# EAGLE board panel (EAGLE 9.3.0), part 1 of 3
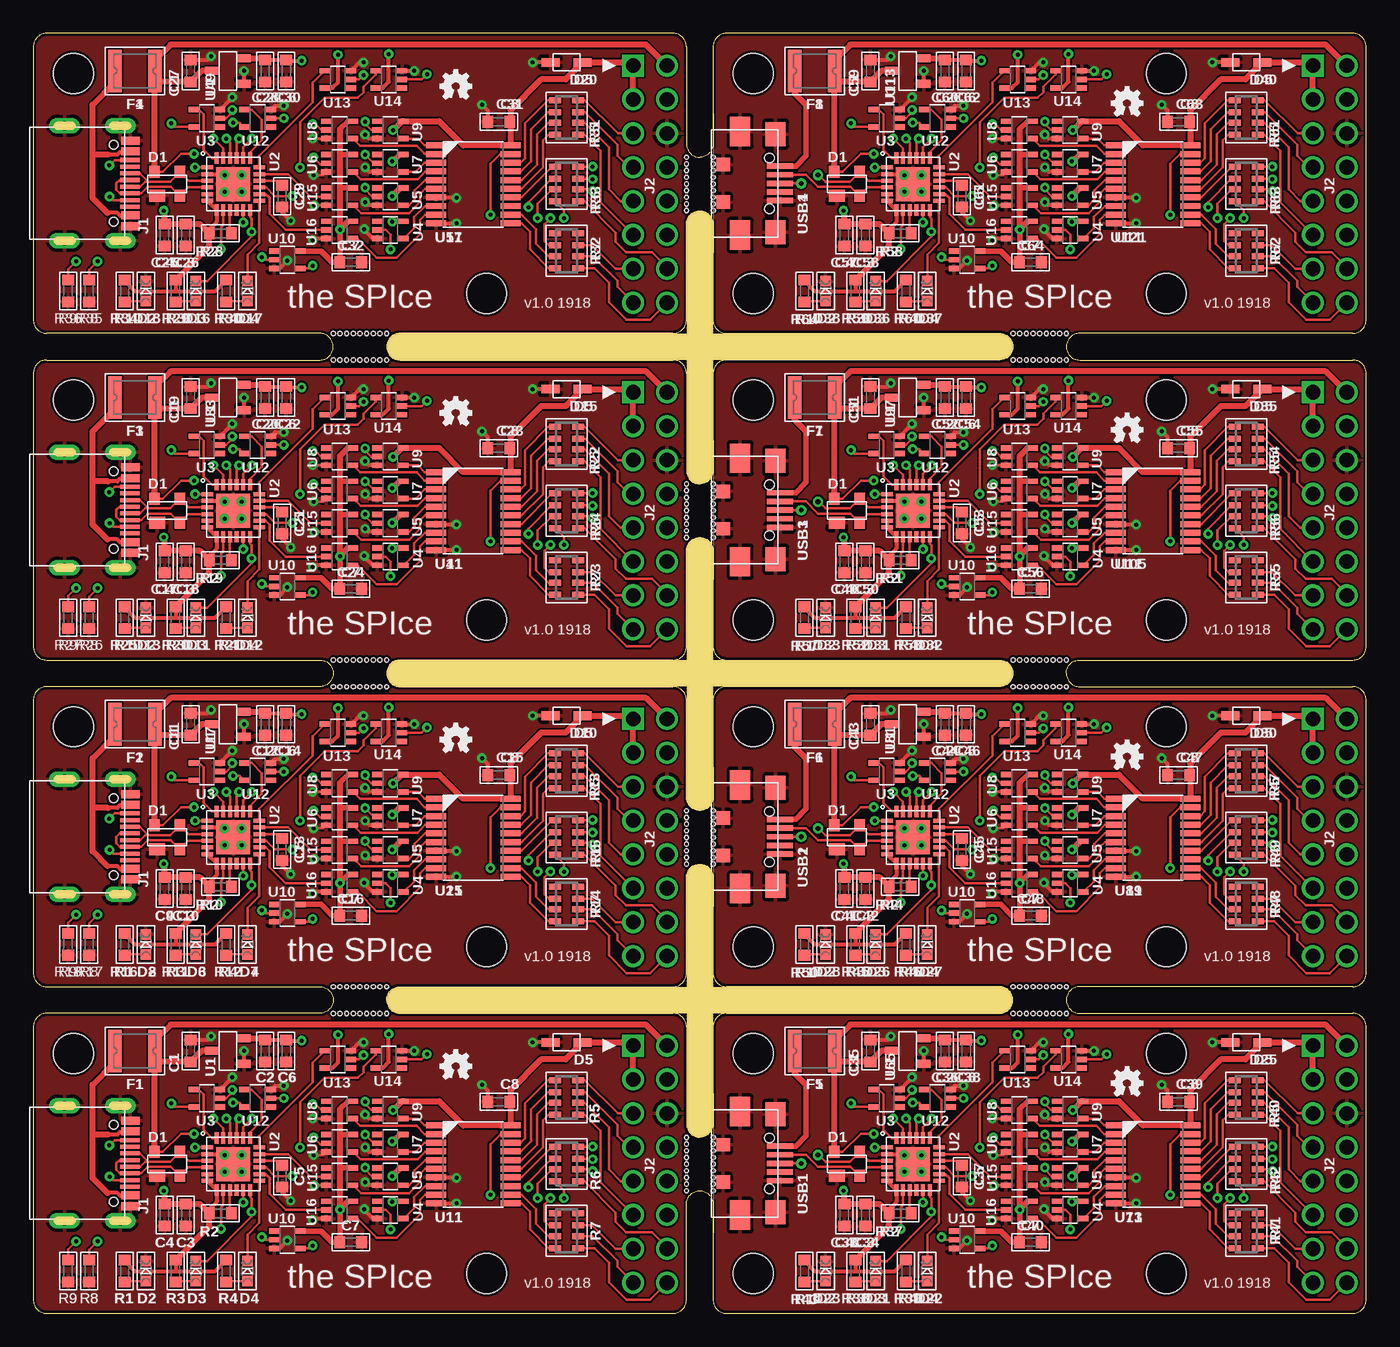
[diagram p0: board, top side]
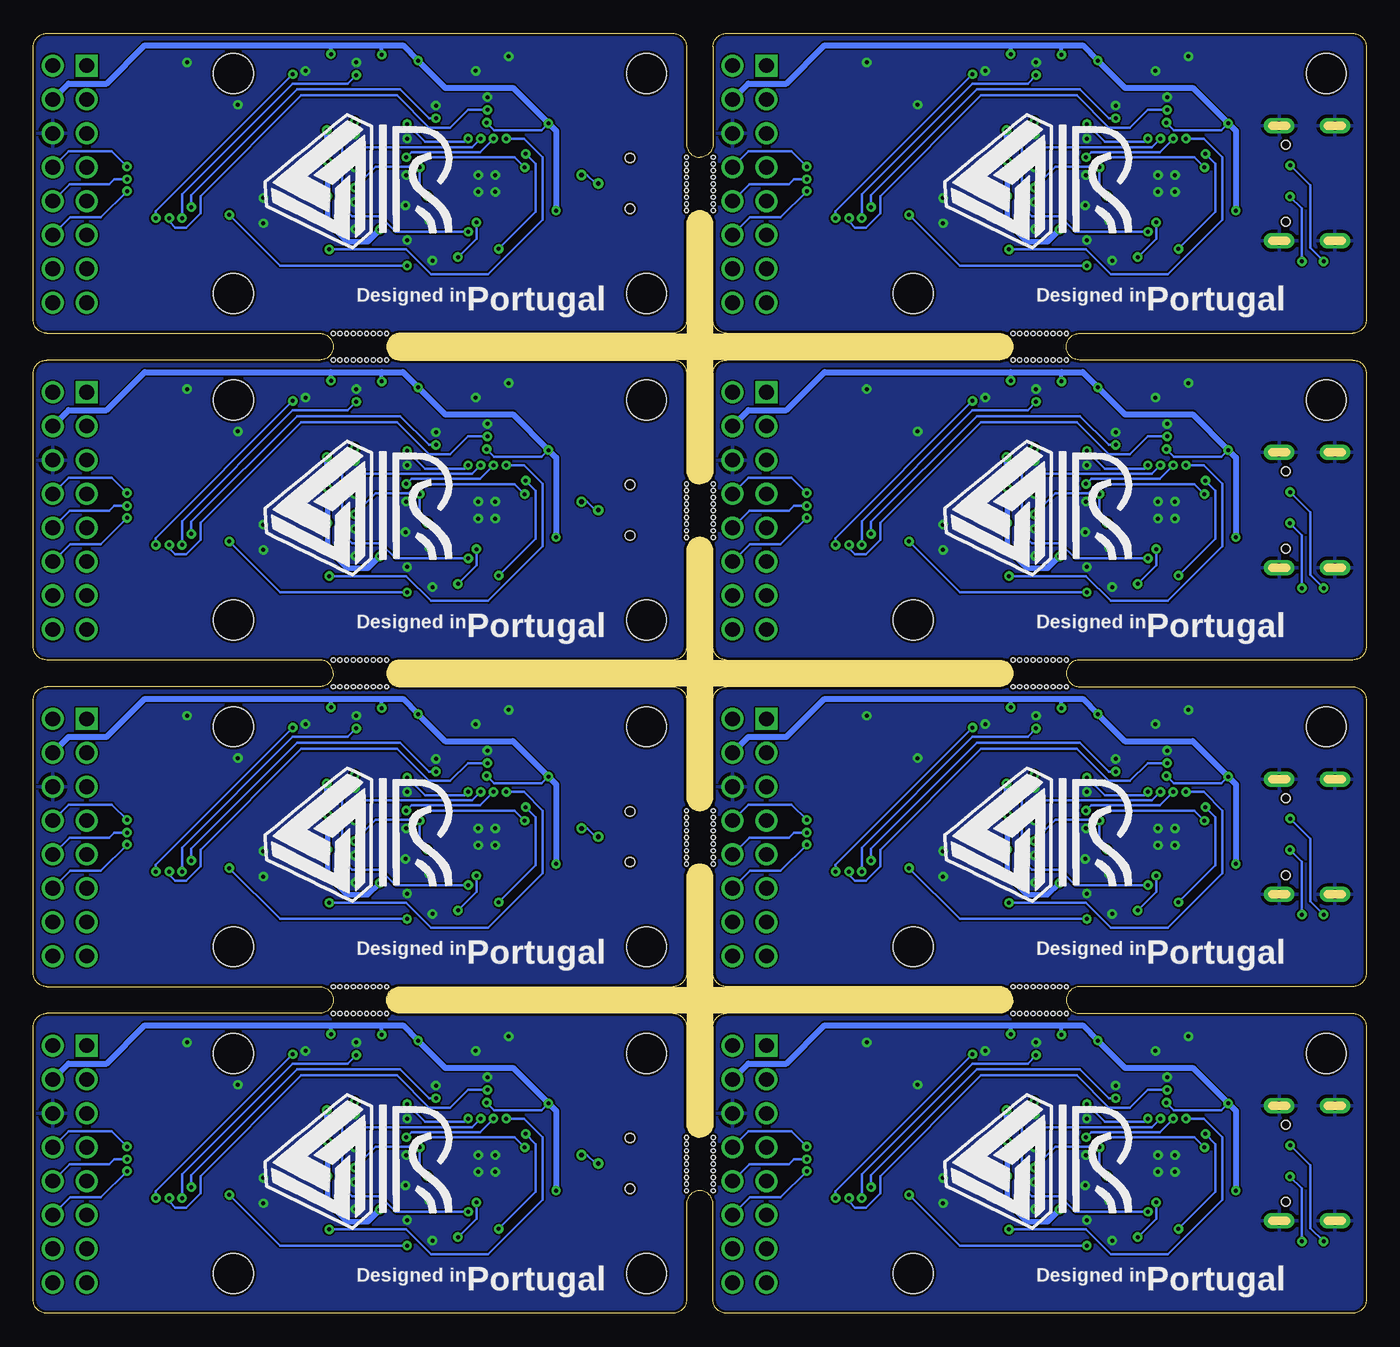
[diagram p1: board, bottom side, seen from below]

Size 100 x 96 mm. Coordinates in mm from the lower left corner, seen from the top.
Outline: 0,21.5 0,1 arc90 1,0 48,0 arc90 49,1 49,8.2 arc-90 50,9.2 arc-90 51,8.2 51,1 arc90 52,0 99,0 arc90 100,1 100,21.5 arc90 99,22.5 78.5,22.5 arc-90 77.5,23.5 arc-90 78.5,24.5 99,24.5 arc90 100,25.5 100,46 arc90 99,47 78.5,47 arc-90 77.5,48 arc-90 78.5,49 99,49 arc90 100,50 100,70.5 arc90 99,71.5 78.5,71.5 arc-90 77.5,72.5 arc-90 78.5,73.5 99,73.5 arc90 100,74.5 100,95 arc90 99,96 52,96 arc90 51,95 51,87.7 arc-90 50,86.7 arc-90 49,87.7 49,95 arc90 48,96 1,96 arc90 0,95 0,74.5 arc90 1,73.5 21.5,73.5 arc-90 22.5,72.5 arc-90 21.5,71.5 1,71.5 arc90 0,70.5 0,50 arc90 1,49 21.5,49 arc-90 22.5,48 arc-90 21.5,47 1,47 arc90 0,46 0,25.5 arc90 1,24.5 21.5,24.5 arc-90 22.5,23.5 arc-90 21.5,22.5 1,22.5 arc90 0,21.5
Outline: 49,21.5 49,14.2 arc90 50,13.2 arc90 51,14.2 51,21.5 arc-90 52,22.5 72.5,22.5 arc90 73.5,23.5 arc90 72.5,24.5 52,24.5 arc-90 51,25.5 51,32.7 arc90 50,33.7 arc90 49,32.7 49,25.5 arc-90 48,24.5 27.5,24.5 arc90 26.5,23.5 arc90 27.5,22.5 48,22.5 arc-90 49,21.5
Outline: 51,46 51,38.7 arc-90 50,37.7 arc-90 49,38.7 49,46 arc90 48,47 27.5,47 arc-90 26.5,48 arc-90 27.5,49 48,49 arc90 49,50 49,57.2 arc-90 50,58.2 arc-90 51,57.2 51,50 arc90 52,49 72.5,49 arc-90 73.5,48 arc-90 72.5,47 52,47 arc90 51,46
Outline: 49,70.5 49,63.2 arc90 50,62.2 arc90 51,63.2 51,70.5 arc-90 52,71.5 72.5,71.5 arc90 73.5,72.5 arc90 72.5,73.5 52,73.5 arc-90 51,74.5 51,81.7 arc90 50,82.7 arc90 49,81.7 49,74.5 arc-90 48,73.5 27.5,73.5 arc90 26.5,72.5 arc90 27.5,71.5 48,71.5 arc-90 49,70.5
Copper layers (1*16): Top 0.035mm / dielectric 1.6mm / Bottom 0.035mm
Design rules "jlcpcb-dr": minimum track width 5mil, minimum drill 0.3mm, track to track 5mil, track to pad 5mil, pad to pad 5mil, via to via 5mil, smd to smd 5mil, copper to edge 0.2mm, drill to drill 5mil, minimum pad ring 10mil, minimum via ring 8mil, stop-mask expansion 4mil, vias tented up to drill 0.7mm, thermal gap 10mil
Holes 3 mm at 3,19.5 34,3 3,44 34,27.5 3,68.5 34,52 3,93 34,76.5 54,19.5 54,3 85,19.5 85,3 54,44 54,27.5 85,44 85,27.5 54,68.5 54,52 85,68.5 85,52 54,93 54,76.5 85,93 85,76.5
Holes 0.3 mm at 22.5,22.5 23,22.5 23.5,22.5 24,22.5 24.5,22.5 25,22.5 25.5,22.5 26,22.5 26.5,22.5 26.5,24.5 26,24.5 25.5,24.5 25,24.5 24.5,24.5 24,24.5 23.5,24.5 23,24.5 22.5,24.5 22.5,47 23,47 23.5,47 24,47 24.5,47 25,47 25.5,47 26,47 26.5,47 26.5,49 26,49 25.5,49 25,49 24.5,49 24,49 23.5,49 23,49 22.5,49 22.5,71.5 23,71.5 23.5,71.5 24,71.5 24.5,71.5 25,71.5 25.5,71.5 26,71.5 26.5,71.5 26.5,73.5 26,73.5 25.5,73.5 25,73.5 24.5,73.5 24,73.5 23.5,73.5 23,73.5 22.5,73.5 73.5,71.5 74,71.5 74.5,71.5 75,71.5 75.5,71.5 76,71.5 76.5,71.5 77,71.5 77.5,71.5 77.5,73.5 77,73.5 76.5,73.5 76,73.5 75.5,73.5 75,73.5 74.5,73.5 74,73.5 73.5,73.5 73.5,47 74,47 74.5,47 75,47 75.5,47 76,47 76.5,47 77,47 77.5,47 77.5,49 77,49 76.5,49 76,49 75.5,49 75,49 74.5,49 74,49 73.5,49 73.5,22.5 74,22.5 74.5,22.5 75,22.5 75.5,22.5 76,22.5 76.5,22.5 77,22.5 77.5,22.5 77.5,24.5 77,24.5 76.5,24.5 76,24.5 75.5,24.5 75,24.5 74.5,24.5 74,24.5 73.5,24.5 51,9.2 51,9.7 51,10.2 51,10.7 51,11.2 51,11.7 51,12.2 51,12.7 51,13.2 49,13.2 49,12.7 49,12.2 49,11.7 49,11.2 49,10.7 49,10.2 49,9.7 49,9.2 51,33.7 51,34.2 51,34.7 51,35.2 51,35.7 51,36.2 51,36.7 51,37.2 51,37.7 49,37.7 49,37.2 49,36.7 49,36.2 49,35.7 49,35.2 49,34.7 49,34.2 49,33.7 51,58.2 51,58.7 51,59.2 51,59.7 51,60.2 51,60.7 51,61.2 51,61.7 51,62.2 49,62.2 49,61.7 49,61.2 49,60.7 49,60.2 49,59.7 49,59.2 49,58.7 49,58.2 51,82.7 51,83.2 51,83.7 51,84.2 51,84.7 51,85.2 51,85.7 51,86.2 51,86.7 49,86.7 49,86.2 49,85.7 49,85.2 49,84.7 49,84.2 49,83.7 49,83.2 49,82.7
Milling: 6 lines

## Footprints (pad centres in the part's own frame; a part is rotated, then mirrored left to right if it is on the bottom)
0603_WAVE = smd 0.8 x 0.9: P$1 -0.823,0; P$2 0.823,0
SOT143 = smd 1.2 x 0.9: 1 -0.711,-0.889 | smd 0.8 x 0.9: 2 0.989,-0.889; 3 0.989,0.911; 4 -0.911,0.911
CHIPLED_0603 = smd 0.8 x 0.8: A 0,-0.75; C 0,0.75
SOD323 = smd 1.35 x 0.65: P$1 -1.2,0; P$2 1.2,0
PTC1210 = smd 1 x 3.2: P$1 -1.5,0; P$2 1.5,0
USB-C = smd 0.6 x 1.4: A1_B12 -3.2,7.276; A4_B9 -2.4,7.276; B1_A12 3.2,7.276; B4_A9 2.4,7.276 | smd 0.3 x 1.45: A5 -1.75,7.251; A6 -0.75,7.251; A7 0.75,7.251; A8 1.75,7.251; B5 1.27,7.251; B6 0.25,7.251; B7 -0.25,7.251; B8 -1.25,7.251 | drill 0.65 pad 1 long: SHIELD0 -4.32,6.526; SHIELD1 -4.32,2.346; SHIELD2 4.32,2.346; SHIELD3 4.32,6.526 | hole 0.65: -2.89,6.026; 2.89,6.026
2X8_2.54 = drill 1.1 square: 1 -8.89,-1.27 | drill 1.1: 2 -8.89,1.27; 3 -6.35,-1.27; 4 -6.35,1.27; 5 -3.81,-1.27; 6 -3.81,1.27; 7 -1.27,-1.27; 8 -1.27,1.27; 9 1.27,-1.27; 10 1.27,1.27; 11 3.81,-1.27; 12 3.81,1.27; 13 6.35,-1.27; 14 6.35,1.27; 15 8.89,-1.27; 16 8.89,1.27
RESPACK_4X0603 = smd 0.45 x 0.9: 1 -1.3,-0.85; 2 -0.4,-0.85; 3 0.4,-0.85; 4 1.3,-0.85; 5 1.3,0.85; 6 0.4,0.85; 7 -0.4,0.85; 8 -1.3,0.85
SOT-23 = smd 0.6 x 1: 1 -0.95,-1.2; 2 0.95,-1.2; 3 0,1.2
QFN24 = smd 0.3 x 0.85: 1 -1.25,-1.95; 2 -0.75,-1.95; 3 -0.25,-1.95; 4 0.25,-1.95; 5 0.75,-1.95; 6 1.25,-1.95; 13 1.25,1.95; 14 0.75,1.95; 15 0.25,1.95; 16 -0.25,1.95; 17 -0.75,1.95; 18 -1.25,1.95 | smd 0.85 x 0.3: 7 1.95,-1.25; 8 1.95,-0.75; 9 1.95,-0.25; 10 1.95,0.25; 11 1.95,0.75; 12 1.95,1.25; 19 -1.95,1.25; 20 -1.95,0.75; 21 -1.95,0.25; 22 -1.95,-0.25; 23 -1.95,-0.75; 24 -1.95,-1.25 | smd 2.55 x 2.55: PAD 0,0
SC70-5 = smd 0.4 x 0.75: 1 -0.65,-1; 2 0,-1; 3 0.65,-1; 4 0.65,1; 5 -0.65,1
TSSOP20 = smd 0.45 x 1.5: 1 -2.91,-2.8; 2 -2.26,-2.8; 3 -1.61,-2.8; 4 -0.96,-2.8; 5 -0.31,-2.8; 6 0.34,-2.8; 7 0.99,-2.8; 8 1.64,-2.8; 9 2.29,-2.8; 10 2.94,-2.8; 11 2.94,2.8; 12 2.29,2.8; 13 1.64,2.8; 14 0.99,2.8; 15 0.34,2.8; 16 -0.31,2.796; 17 -0.96,2.796; 18 -1.61,2.8; 19 -2.26,2.8; 20 -2.91,2.8
USB-MICRO-SMD = smd 1.95 x 0.4: D+ 2.975,0; D- 2.975,0.65; GND 2.975,-1.3; ID 2.975,-0.65; VBUS 2.975,1.3 | smd 1.5 x 2.2: SHIELD1 0,3.885; SHIELD2 0,-3.885 | smd 1.5 x 1.8: SHIELD3 2.667,3.685; SHIELD4 2.667,-3.685 | smd 1 x 1: SHIELD5 -1.27,1.4; SHIELD6 -1.27,-1.4 | hole 0.7: 2.2,1.9; 2.2,-1.9

## Placement (x,y rotation side)
C1  [0603_WAVE]  11.81,19.68 90 top
C2  [0603_WAVE]  17.4,19.68 270 top
C3  [0603_WAVE]  11.43,7.37 270 top
C4  [0603_WAVE]  9.84,7.37 270 top
C5  [0603_WAVE]  18.67,10.29 270 top
C6  [0603_WAVE]  18.99,19.68 270 top
C7  [0603_WAVE]  23.81,5.33 0 top
C8  [0603_WAVE]  34.92,15.88 180 top
C9  [0603_WAVE]  9.84,31.87 270 top
C10  [0603_WAVE]  11.43,31.87 270 top
C11  [0603_WAVE]  11.81,44.19 90 top
C12  [0603_WAVE]  17.4,44.19 270 top
C13  [0603_WAVE]  18.67,34.79 270 top
C14  [0603_WAVE]  18.99,44.19 270 top
C15  [0603_WAVE]  34.92,40.38 180 top
C16  [0603_WAVE]  23.81,29.83 0 top
C17  [0603_WAVE]  9.84,56.37 270 top
C18  [0603_WAVE]  11.43,56.37 270 top
C19  [0603_WAVE]  11.81,68.69 90 top
C20  [0603_WAVE]  17.4,68.69 270 top
C21  [0603_WAVE]  18.67,59.29 270 top
C22  [0603_WAVE]  18.99,68.69 270 top
C23  [0603_WAVE]  34.92,64.88 180 top
C24  [0603_WAVE]  23.81,54.33 0 top
C25  [0603_WAVE]  9.84,80.87 270 top
C26  [0603_WAVE]  11.43,80.87 270 top
C27  [0603_WAVE]  11.81,93.19 90 top
C28  [0603_WAVE]  17.4,93.19 270 top
C29  [0603_WAVE]  18.67,83.79 270 top
C30  [0603_WAVE]  18.99,93.19 270 top
C31  [0603_WAVE]  34.92,89.38 180 top
C32  [0603_WAVE]  23.81,78.83 0 top
C33  [0603_WAVE]  60.84,7.37 270 top
C34  [0603_WAVE]  62.43,7.37 270 top
C35  [0603_WAVE]  62.81,19.68 90 top
C36  [0603_WAVE]  68.4,19.68 270 top
C37  [0603_WAVE]  69.67,10.29 270 top
C38  [0603_WAVE]  69.99,19.68 270 top
C39  [0603_WAVE]  85.92,15.88 180 top
C40  [0603_WAVE]  74.81,5.33 0 top
C41  [0603_WAVE]  60.84,31.87 270 top
C42  [0603_WAVE]  62.43,31.87 270 top
C43  [0603_WAVE]  62.81,44.19 90 top
C44  [0603_WAVE]  68.4,44.19 270 top
C45  [0603_WAVE]  69.67,34.79 270 top
C46  [0603_WAVE]  69.99,44.19 270 top
C47  [0603_WAVE]  85.92,40.38 180 top
C48  [0603_WAVE]  74.81,29.83 0 top
C49  [0603_WAVE]  60.84,56.37 270 top
C50  [0603_WAVE]  62.43,56.37 270 top
C51  [0603_WAVE]  62.81,68.69 90 top
C52  [0603_WAVE]  68.4,68.69 270 top
C53  [0603_WAVE]  69.67,59.29 270 top
C54  [0603_WAVE]  69.99,68.69 270 top
C55  [0603_WAVE]  85.92,64.88 180 top
C56  [0603_WAVE]  74.81,54.33 0 top
C57  [0603_WAVE]  60.84,80.87 270 top
C58  [0603_WAVE]  62.43,80.87 270 top
C59  [0603_WAVE]  62.81,93.19 90 top
C60  [0603_WAVE]  68.4,93.19 270 top
C61  [0603_WAVE]  69.67,83.79 270 top
C62  [0603_WAVE]  69.99,93.19 270 top
C63  [0603_WAVE]  85.92,89.38 180 top
C64  [0603_WAVE]  74.81,78.83 0 top
D1  SP0503BAHT  [SOT143]  10,11.19 0 top
D2  LED0603  [CHIPLED_0603]  8.45,3.17 0 top
D3  LED0603  [CHIPLED_0603]  12.19,3.17 0 top
D4  LED0603  [CHIPLED_0603]  16.07,3.17 0 top
D5  PESD5V0S1BAF  [SOD323]  40.01,20.32 180 top
D6  LED0603  [CHIPLED_0603]  12.19,27.68 0 top
D7  LED0603  [CHIPLED_0603]  16.07,27.68 0 top
D8  LED0603  [CHIPLED_0603]  8.45,27.68 0 top
D9  SP0503BAHT  [SOT143]  10,35.69 0 top
D10  PESD5V0S1BAF  [SOD323]  40.01,44.82 180 top
D11  LED0603  [CHIPLED_0603]  12.19,52.17 0 top
D12  LED0603  [CHIPLED_0603]  16.07,52.17 0 top
D13  LED0603  [CHIPLED_0603]  8.45,52.17 0 top
D14  SP0503BAHT  [SOT143]  10,60.19 0 top
D15  PESD5V0S1BAF  [SOD323]  40.01,69.32 180 top
D16  LED0603  [CHIPLED_0603]  12.19,76.67 0 top
D17  LED0603  [CHIPLED_0603]  16.07,76.67 0 top
D18  LED0603  [CHIPLED_0603]  8.45,76.67 0 top
D19  SP0503BAHT  [SOT143]  10,84.69 0 top
D20  PESD5V0S1BAF  [SOD323]  40.01,93.82 180 top
D21  LED0603  [CHIPLED_0603]  63.19,3.17 0 top
D22  LED0603  [CHIPLED_0603]  67.07,3.17 0 top
D23  LED0603  [CHIPLED_0603]  59.45,3.17 0 top
D24  SP0503BAHT  [SOT143]  61,11.19 0 top
D25  PESD5V0S1BAF  [SOD323]  91,20.32 180 top
D26  LED0603  [CHIPLED_0603]  63.19,27.68 0 top
D27  LED0603  [CHIPLED_0603]  67.07,27.68 0 top
D28  LED0603  [CHIPLED_0603]  59.45,27.68 0 top
D29  SP0503BAHT  [SOT143]  61,35.69 0 top
D30  PESD5V0S1BAF  [SOD323]  91,44.82 180 top
D31  LED0603  [CHIPLED_0603]  63.19,52.17 0 top
D32  LED0603  [CHIPLED_0603]  67.07,52.17 0 top
D33  LED0603  [CHIPLED_0603]  59.45,52.17 0 top
D34  SP0503BAHT  [SOT143]  61,60.19 0 top
D35  PESD5V0S1BAF  [SOD323]  91,69.32 180 top
D36  LED0603  [CHIPLED_0603]  63.19,76.67 0 top
D37  LED0603  [CHIPLED_0603]  67.07,76.67 0 top
D38  LED0603  [CHIPLED_0603]  59.45,76.67 0 top
D39  SP0503BAHT  [SOT143]  61,84.69 0 top
D40  PESD5V0S1BAF  [SOD323]  91,93.82 180 top
F1  [PTC1210]  7.62,19.68 180 top
F2  [PTC1210]  7.62,44.19 180 top
F3  [PTC1210]  7.62,68.69 180 top
F4  [PTC1210]  7.62,93.19 180 top
F5  [PTC1210]  58.62,19.68 180 top
F6  [PTC1210]  58.62,44.19 180 top
F7  [PTC1210]  58.62,68.69 180 top
F8  [PTC1210]  58.62,93.19 180 top
J1  USB-C  [USB-C]  0,11.25 270 top
J2  2X8  [2X8_2.54]  46.27,11.19 270 top
J3  2X8  [2X8_2.54]  46.27,35.69 270 top
J4  USB-C  [USB-C]  0,35.75 270 top
J5  2X8  [2X8_2.54]  46.27,60.19 270 top
J6  USB-C  [USB-C]  0,60.25 270 top
J7  2X8  [2X8_2.54]  46.27,84.69 270 top
J8  USB-C  [USB-C]  0,84.75 270 top
J9  2X8  [2X8_2.54]  97.27,11.19 270 top
J10  2X8  [2X8_2.54]  97.27,35.69 270 top
J11  2X8  [2X8_2.54]  97.27,60.19 270 top
J12  2X8  [2X8_2.54]  97.27,84.69 270 top
R1  [0603_WAVE]  6.86,3.17 90 top
R2  [0603_WAVE]  14.03,7.49 0 top
R3  [0603_WAVE]  10.67,3.17 90 top
R4  [0603_WAVE]  14.48,3.17 90 top
R5  [RESPACK_4X0603]  40,16.19 270 top
R6  [RESPACK_4X0603]  40,11.19 90 top
R7  [RESPACK_4X0603]  40,6.19 270 top
R8  5k1  [0603_WAVE]  4.19,3.17 90 top
R9  5k1  [0603_WAVE]  2.6,3.17 90 top
R10  [0603_WAVE]  14.03,31.99 0 top
R11  [0603_WAVE]  10.67,27.68 90 top
R12  [0603_WAVE]  14.48,27.68 90 top
R13  [RESPACK_4X0603]  40,40.69 270 top
R14  [RESPACK_4X0603]  40,30.69 270 top
R15  [RESPACK_4X0603]  40,35.69 90 top
R16  [0603_WAVE]  6.86,27.68 90 top
R17  5k1  [0603_WAVE]  4.19,27.68 90 top
R18  5k1  [0603_WAVE]  2.6,27.68 90 top
R19  [0603_WAVE]  14.03,56.49 0 top
R20  [0603_WAVE]  10.67,52.17 90 top
R21  [0603_WAVE]  14.48,52.17 90 top
R22  [RESPACK_4X0603]  40,65.19 270 top
R23  [RESPACK_4X0603]  40,55.19 270 top
R24  [RESPACK_4X0603]  40,60.19 90 top
R25  [0603_WAVE]  6.86,52.17 90 top
R26  5k1  [0603_WAVE]  4.19,52.17 90 top
R27  5k1  [0603_WAVE]  2.6,52.17 90 top
R28  [0603_WAVE]  14.03,80.99 0 top
R29  [0603_WAVE]  10.67,76.67 90 top
R30  [0603_WAVE]  14.48,76.67 90 top
R31  [RESPACK_4X0603]  40,89.69 270 top
R32  [RESPACK_4X0603]  40,79.69 270 top
R33  [RESPACK_4X0603]  40,84.69 90 top
R34  [0603_WAVE]  6.86,76.67 90 top
R35  5k1  [0603_WAVE]  4.19,76.67 90 top
R36  5k1  [0603_WAVE]  2.6,76.67 90 top
R37  [0603_WAVE]  65.03,7.49 0 top
R38  [0603_WAVE]  61.67,3.17 90 top
R39  [0603_WAVE]  65.48,3.17 90 top
R40  [RESPACK_4X0603]  91,16.19 270 top
R41  [RESPACK_4X0603]  91,6.19 270 top
R42  [RESPACK_4X0603]  91,11.19 90 top
R43  [0603_WAVE]  57.86,3.17 90 top
R44  [0603_WAVE]  65.03,31.99 0 top
R45  [0603_WAVE]  61.67,27.68 90 top
R46  [0603_WAVE]  65.48,27.68 90 top
R47  [RESPACK_4X0603]  91,40.69 270 top
R48  [RESPACK_4X0603]  91,30.69 270 top
R49  [RESPACK_4X0603]  91,35.69 90 top
R50  [0603_WAVE]  57.86,27.68 90 top
R51  [0603_WAVE]  65.03,56.49 0 top
R52  [0603_WAVE]  61.67,52.17 90 top
R53  [0603_WAVE]  65.48,52.17 90 top
R54  [RESPACK_4X0603]  91,65.19 270 top
R55  [RESPACK_4X0603]  91,55.19 270 top
R56  [RESPACK_4X0603]  91,60.19 90 top
R57  [0603_WAVE]  57.86,52.17 90 top
R58  [0603_WAVE]  65.03,80.99 0 top
R59  [0603_WAVE]  61.67,76.67 90 top
R60  [0603_WAVE]  65.48,76.67 90 top
R61  [RESPACK_4X0603]  91,89.69 270 top
R62  [RESPACK_4X0603]  91,79.69 270 top
R63  [RESPACK_4X0603]  91,84.69 90 top
R64  [0603_WAVE]  57.86,76.67 90 top
U1  MCP1700T-3302TT  [SOT-23]  14.61,19.68 90 top
U2  CP2130  [QFN24]  15,11.19 270 top
U3  74LVC1G17  [SC70-5]  13.02,16.13 90 top
U4  74LVC1G17  [SC70-5]  26.8,7.76 270 top
U5  74LVC1G17  [SC70-5]  26.8,10.26 270 top
U6  74LVC1G17  [SC70-5]  22.99,12.76 270 top
U7  74LVC1G17  [SC70-5]  26.8,12.76 270 top
U8  74LVC1G17  [SC70-5]  22.99,15.26 270 top
U9  74LVC1G17  [SC70-5]  26.8,15.26 270 top
U10  74LVC1G17  [SC70-5]  19.05,5.52 270 top
U11  74HC541  [TSSOP20]  33,11.19 270 top
U12  74LVC1G17  [SC70-5]  16.83,16.13 90 top
U13  74LVC1G17  [SC70-5]  22.86,19.05 90 top
U14  74LVC1G17  [SC70-5]  26.67,19.05 90 top
U15  74LVC1G17  [SC70-5]  22.99,10.26 270 top
U16  74LVC1G17  [SC70-5]  22.99,7.76 270 top
U17  MCP1700T-3302TT  [SOT-23]  14.61,44.19 90 top
U18  CP2130  [QFN24]  15,35.69 270 top
U19  74LVC1G17  [SC70-5]  16.83,40.63 90 top
U20  74LVC1G17  [SC70-5]  22.86,43.55 90 top
U21  74LVC1G17  [SC70-5]  26.67,43.55 90 top
U22  74LVC1G17  [SC70-5]  22.99,32.26 270 top
U23  74LVC1G17  [SC70-5]  26.8,39.76 270 top
U24  74LVC1G17  [SC70-5]  19.05,30.02 270 top
U25  74HC541  [TSSOP20]  33,35.69 270 top
U26  74LVC1G17  [SC70-5]  13.02,40.63 90 top
U27  74LVC1G17  [SC70-5]  26.8,32.26 270 top
U28  74LVC1G17  [SC70-5]  26.8,34.76 270 top
U29  74LVC1G17  [SC70-5]  22.99,37.26 270 top
U30  74LVC1G17  [SC70-5]  26.8,37.26 270 top
U31  74LVC1G17  [SC70-5]  22.99,39.76 270 top
U32  74LVC1G17  [SC70-5]  22.99,34.76 270 top
U33  MCP1700T-3302TT  [SOT-23]  14.61,68.69 90 top
U34  CP2130  [QFN24]  15,60.19 270 top
U35  74LVC1G17  [SC70-5]  16.83,65.13 90 top
U36  74LVC1G17  [SC70-5]  22.86,68.05 90 top
U37  74LVC1G17  [SC70-5]  26.67,68.05 90 top
U38  74LVC1G17  [SC70-5]  22.99,56.76 270 top
U39  74LVC1G17  [SC70-5]  26.8,64.26 270 top
U40  74LVC1G17  [SC70-5]  19.05,54.52 270 top
U41  74HC541  [TSSOP20]  33,60.19 270 top
U42  74LVC1G17  [SC70-5]  13.02,65.13 90 top
U43  74LVC1G17  [SC70-5]  26.8,56.76 270 top
U44  74LVC1G17  [SC70-5]  26.8,59.26 270 top
U45  74LVC1G17  [SC70-5]  22.99,61.76 270 top
U46  74LVC1G17  [SC70-5]  26.8,61.76 270 top
U47  74LVC1G17  [SC70-5]  22.99,64.26 270 top
U48  74LVC1G17  [SC70-5]  22.99,59.26 270 top
U49  MCP1700T-3302TT  [SOT-23]  14.61,93.19 90 top
U50  CP2130  [QFN24]  15,84.69 270 top
U51  74LVC1G17  [SC70-5]  16.83,89.63 90 top
U52  74LVC1G17  [SC70-5]  22.86,92.55 90 top
U53  74LVC1G17  [SC70-5]  26.67,92.55 90 top
U54  74LVC1G17  [SC70-5]  22.99,81.26 270 top
U55  74LVC1G17  [SC70-5]  26.8,88.76 270 top
U56  74LVC1G17  [SC70-5]  19.05,79.02 270 top
U57  74HC541  [TSSOP20]  33,84.69 270 top
U58  74LVC1G17  [SC70-5]  13.02,89.63 90 top
U59  74LVC1G17  [SC70-5]  26.8,81.26 270 top
U60  74LVC1G17  [SC70-5]  26.8,83.76 270 top
U61  74LVC1G17  [SC70-5]  22.99,86.26 270 top
U62  74LVC1G17  [SC70-5]  26.8,86.26 270 top
U63  74LVC1G17  [SC70-5]  22.99,88.76 270 top
U64  74LVC1G17  [SC70-5]  22.99,83.76 270 top
U65  MCP1700T-3302TT  [SOT-23]  65.61,19.68 90 top
U66  CP2130  [QFN24]  66,11.19 270 top
U67  74LVC1G17  [SC70-5]  67.83,16.13 90 top
U68  74LVC1G17  [SC70-5]  73.86,19.05 90 top
U69  74LVC1G17  [SC70-5]  77.67,19.05 90 top
U70  74LVC1G17  [SC70-5]  73.99,7.76 270 top
U71  74LVC1G17  [SC70-5]  77.8,15.26 270 top
U72  74LVC1G17  [SC70-5]  70.05,5.52 270 top
U73  74HC541  [TSSOP20]  84,11.19 270 top
U74  74LVC1G17  [SC70-5]  64.02,16.13 90 top
U75  74LVC1G17  [SC70-5]  77.8,7.76 270 top
U76  74LVC1G17  [SC70-5]  77.8,10.26 270 top
U77  74LVC1G17  [SC70-5]  73.99,12.76 270 top
U78  74LVC1G17  [SC70-5]  77.8,12.76 270 top
U79  74LVC1G17  [SC70-5]  73.99,15.26 270 top
U80  74LVC1G17  [SC70-5]  73.99,10.26 270 top
U81  MCP1700T-3302TT  [SOT-23]  65.61,44.19 90 top
U82  CP2130  [QFN24]  66,35.69 270 top
U83  74LVC1G17  [SC70-5]  67.83,40.63 90 top
U84  74LVC1G17  [SC70-5]  73.86,43.55 90 top
U85  74LVC1G17  [SC70-5]  77.67,43.55 90 top
U86  74LVC1G17  [SC70-5]  73.99,32.26 270 top
U87  74LVC1G17  [SC70-5]  77.8,39.76 270 top
U88  74LVC1G17  [SC70-5]  70.05,30.02 270 top
U89  74HC541  [TSSOP20]  84,35.69 270 top
U90  74LVC1G17  [SC70-5]  64.02,40.63 90 top
U91  74LVC1G17  [SC70-5]  77.8,32.26 270 top
U92  74LVC1G17  [SC70-5]  77.8,34.76 270 top
U93  74LVC1G17  [SC70-5]  73.99,37.26 270 top
U94  74LVC1G17  [SC70-5]  77.8,37.26 270 top
U95  74LVC1G17  [SC70-5]  73.99,39.76 270 top
U96  74LVC1G17  [SC70-5]  73.99,34.76 270 top
U97  MCP1700T-3302TT  [SOT-23]  65.61,68.69 90 top
U98  CP2130  [QFN24]  66,60.19 270 top
U99  74LVC1G17  [SC70-5]  67.83,65.13 90 top
U100  74LVC1G17  [SC70-5]  73.86,68.05 90 top
U101  74LVC1G17  [SC70-5]  77.67,68.05 90 top
U102  74LVC1G17  [SC70-5]  73.99,56.76 270 top
U103  74LVC1G17  [SC70-5]  77.8,64.26 270 top
U104  74LVC1G17  [SC70-5]  70.05,54.52 270 top
U105  74HC541  [TSSOP20]  84,60.19 270 top
U106  74LVC1G17  [SC70-5]  64.02,65.13 90 top
U107  74LVC1G17  [SC70-5]  77.8,56.76 270 top
U108  74LVC1G17  [SC70-5]  77.8,59.26 270 top
U109  74LVC1G17  [SC70-5]  73.99,61.76 270 top
U110  74LVC1G17  [SC70-5]  77.8,61.76 270 top
U111  74LVC1G17  [SC70-5]  73.99,64.26 270 top
U112  74LVC1G17  [SC70-5]  73.99,59.26 270 top
U113  MCP1700T-3302TT  [SOT-23]  65.61,93.19 90 top
U114  CP2130  [QFN24]  66,84.69 270 top
U115  74LVC1G17  [SC70-5]  67.83,89.63 90 top
U116  74LVC1G17  [SC70-5]  73.86,92.55 90 top
U117  74LVC1G17  [SC70-5]  77.67,92.55 90 top
U118  74LVC1G17  [SC70-5]  73.99,81.26 270 top
U119  74LVC1G17  [SC70-5]  77.8,88.76 270 top
U120  74LVC1G17  [SC70-5]  70.05,79.02 270 top
U121  74HC541  [TSSOP20]  84,84.69 270 top
U122  74LVC1G17  [SC70-5]  64.02,89.63 90 top
U123  74LVC1G17  [SC70-5]  77.8,81.26 270 top
U124  74LVC1G17  [SC70-5]  77.8,83.76 270 top
U125  74LVC1G17  [SC70-5]  73.99,86.26 270 top
U126  74LVC1G17  [SC70-5]  77.8,86.26 270 top
U127  74LVC1G17  [SC70-5]  73.99,88.76 270 top
U128  74LVC1G17  [SC70-5]  73.99,83.76 270 top
U$1  [DESIGNEDINPT]  17.16,1.72 0 bottom
U$2  [OSHW-LOGO-MINI]  31.7,18.55 0 top
U$3  [DESIGNEDINPT]  17.16,26.22 0 bottom
U$4  [RAFAEL_SILVA_10MM_ALT]  31.6,6.4 0 bottom
U$5  [OSHW-LOGO-MINI]  31.7,43.05 0 top
U$6  [RAFAEL_SILVA_10MM_ALT]  31.6,30.9 0 bottom
U$7  [DESIGNEDINPT]  17.16,50.72 0 bottom
U$8  [OSHW-LOGO-MINI]  31.7,67.55 0 top
U$9  [RAFAEL_SILVA_10MM_ALT]  31.6,55.4 0 bottom
U$10  [DESIGNEDINPT]  17.16,75.22 0 bottom
U$11  [OSHW-LOGO-MINI]  31.7,92.05 0 top
U$12  [RAFAEL_SILVA_10MM_ALT]  31.6,79.9 0 bottom
U$13  [DESIGNEDINPT]  68.16,1.72 0 bottom
U$14  [OSHW-LOGO-MINI]  82.06,17.27 0 top
U$15  [RAFAEL_SILVA_10MM_ALT]  82.6,6.4 0 bottom
U$16  [DESIGNEDINPT]  68.16,26.22 0 bottom
U$17  [OSHW-LOGO-MINI]  82.06,41.77 0 top
U$18  [RAFAEL_SILVA_10MM_ALT]  82.6,30.9 0 bottom
U$19  [DESIGNEDINPT]  68.16,50.72 0 bottom
U$20  [OSHW-LOGO-MINI]  82.06,66.28 0 top
U$21  [RAFAEL_SILVA_10MM_ALT]  82.6,55.4 0 bottom
U$22  [DESIGNEDINPT]  68.16,75.22 0 bottom
U$23  [OSHW-LOGO-MINI]  82.06,90.78 0 top
U$24  [RAFAEL_SILVA_10MM_ALT]  82.6,79.9 0 bottom
USB1  USB_MICRO-MICRO-B-SMT  [USB-MICRO-SMD]  53.03,11.25 0 top
USB2  USB_MICRO-MICRO-B-SMT  [USB-MICRO-SMD]  53.03,35.75 0 top
USB3  USB_MICRO-MICRO-B-SMT  [USB-MICRO-SMD]  53.03,60.25 0 top
USB4  USB_MICRO-MICRO-B-SMT  [USB-MICRO-SMD]  53.03,84.75 0 top

## Library data of the parts
C1-C64 = Passive Components > Capacitors > Multilayer Ceramic Capacitors MLCC
D1 D5 D9 D10 D14 D15 D19 D20 D24 D25 D29 D30 D34 D35 D39 D40 = Circuit Protection > ESD Suppressors \ TVS Diodes
D2-D4 D6-D8 D11-D13 D16-D18 D21-D23 D26-D28 D31-D33 D36-D38 = Opto-electronics > LED Emitters
F1-F8 = Circuit Protection > Resettable Fuses - PPTC
J1 J4 J6 J8 USB1-USB4 = Connectors > USB
J2 J3 J5 J7 J9-J12 = Connectors > Header
R1-R4 R8-R12 R16-R21 R25-R30 R34-R39 R43-R46 R50-R53 R57-R60 R64 = Passive Components > Resistors > Chip Resistors
R5-R7 R13-R15 R22-R24 R31-R33 R40-R42 R47-R49 R54-R56 R61-R63 = Passive Components > Resistors > Resistor Networks & Arrays
U1 U17 U33 U49 U65 U81 U97 U113 = Power > LDO Voltage Regulators
U2 U18 U34 U50 U66 U82 U98 U114 = Semiconductors > Integrated Circuits - ICs > Interface ICs > USB Interface IC
U3-U16 U19-U32 U35-U48 U51-U64 U67-U80 U83-U96 U99-U112 U115-U128 = Semiconductors > Integrated Circuits - ICs > Logic ICs > Logic Gates
U$1-U$24 = Utility > Silkscreen

## Nets
3.3V: C2.P$1 C3.P$1 C4.P$1 C6.P$1 J2.4 R1.P$2 R2.P$1 R3.P$2 R4.P$2 U1.2 U2.5 U2.6 U2.7 U3.5 U12.5 U13.5 U14.5
3.3V1: C9.P$1 C10.P$1 C12.P$1 C14.P$1 J3.4 R10.P$1 R11.P$2 R12.P$2 R16.P$2 U17.2 U18.5 U18.6 U18.7 U19.5 U20.5 U21.5 U26.5
3.3V2: C17.P$1 C18.P$1 C20.P$1 C22.P$1 J5.4 R19.P$1 R20.P$2 R21.P$2 R25.P$2 U33.2 U34.5 U34.6 U34.7 U35.5 U36.5 U37.5 U42.5
3.3V3: C25.P$1 C26.P$1 C28.P$1 C30.P$1 J7.4 R28.P$1 R29.P$2 R30.P$2 R34.P$2 U49.2 U50.5 U50.6 U50.7 U51.5 U52.5 U53.5 U58.5
3.3V4: C33.P$1 C34.P$1 C36.P$1 C38.P$1 J9.4 R37.P$1 R38.P$2 R39.P$2 R43.P$2 U65.2 U66.5 U66.6 U66.7 U67.5 U68.5 U69.5 U74.5
3.3V5: C41.P$1 C42.P$1 C44.P$1 C46.P$1 J10.4 R44.P$1 R45.P$2 R46.P$2 R50.P$2 U81.2 U82.5 U82.6 U82.7 U83.5 U84.5 U85.5 U90.5
3.3V6: C49.P$1 C50.P$1 C52.P$1 C54.P$1 J11.4 R51.P$1 R52.P$2 R53.P$2 R57.P$2 U97.2 U98.5 U98.6 U98.7 U99.5 U100.5 U101.5 U106.5
3.3V7: C57.P$1 C58.P$1 C60.P$1 C62.P$1 J12.4 R58.P$1 R59.P$2 R60.P$2 R64.P$2 U113.2 U114.5 U114.6 U114.7 U115.5 U116.5 U117.5 U122.5
5V: C1.P$1 D1.4 F1.P$1 J2.2 U1.3 U2.8
5V1: C11.P$1 D9.4 F2.P$1 J3.2 U17.3 U18.8
5V2: C19.P$1 D14.4 F3.P$1 J5.2 U33.3 U34.8
5V3: C27.P$1 D19.4 F4.P$1 J7.2 U49.3 U50.8
5V4: C35.P$1 D24.4 F5.P$1 J9.2 U65.3 U66.8
5V5: C43.P$1 D29.4 F6.P$1 J10.2 U81.3 U82.8
5V6: C51.P$1 D34.4 F7.P$1 J11.2 U97.3 U98.8
5V7: C59.P$1 D39.4 F8.P$1 J12.2 U113.3 U114.8
CLKO: R6.5 U11.14
CLKO1: R15.5 U25.14
CLKO2: R24.5 U41.14
CLKO3: R33.5 U57.14
CLKO4: R42.5 U73.14
CLKO5: R49.5 U89.14
CLKO6: R56.5 U105.14
CLKO7: R63.5 U121.14
CLKO-PB: U2.17 U15.2
CLKO-PB1: U18.17 U32.2
CLKO-PB2: U34.17 U48.2
CLKO-PB3: U50.17 U64.2
CLKO-PB4: U66.17 U80.2
CLKO-PB5: U82.17 U96.2
CLKO-PB6: U98.17 U112.2
CLKO-PB7: U114.17 U128.2
CS0: R5.3 U11.16
CS0-PB: U2.22 U6.2
CS0-PB1: U18.22 U29.2
CS0-PB2: U34.22 U45.2
CS0-PB3: U50.22 U61.2
CS0-PB4: U66.22 U77.2
CS0-PB5: U82.22 U93.2
CS0-PB6: U98.22 U109.2
CS0-PB7: U114.22 U125.2
CS1: R5.2 U11.17
CS1-PB: U2.21 U7.2
CS1-PB1: U18.21 U30.2
CS1-PB2: U34.21 U46.2
CS1-PB3: U50.21 U62.2
CS1-PB4: U66.21 U78.2
CS1-PB5: U82.21 U94.2
CS1-PB6: U98.21 U110.2
CS1-PB7: U114.21 U126.2
CS2: R5.1 U11.18
CS2-PB: U2.20 U8.2
CS2-PB1: U18.20 U31.2
CS2-PB2: U34.20 U47.2
CS2-PB3: U50.20 U63.2
CS2-PB4: U66.20 U79.2
CS2-PB5: U82.20 U95.2
CS2-PB6: U98.20 U111.2
CS2-PB7: U114.20 U127.2
CS3: R13.3 U25.16
CS4: R13.2 U25.17
CS5: R13.1 U25.18
CS6: R22.3 U41.16
CS7: R22.2 U41.17
CS8: R22.1 U41.18
CS9: R31.3 U57.16
CS10: R31.2 U57.17
CS11: R31.1 U57.18
CS12: R40.3 U73.16
CS13: R40.2 U73.17
CS14: R40.1 U73.18
CS15: R47.3 U89.16
CS16: R47.2 U89.17
CS17: R47.1 U89.18
CS18: R54.3 U105.16
CS19: R54.2 U105.17
CS20: R54.1 U105.18
CS21: R61.3 U121.16
CS22: R61.2 U121.17
CS23: R61.1 U121.18
DN: D1.2 J1.A7 J1.B7 U2.4
DN1: D9.2 J4.A7 J4.B7 U18.4
DN2: D14.2 J6.A7 J6.B7 U34.4
DN3: D19.2 J8.A7 J8.B7 U50.4
DN4: D24.2 U66.4 USB1.D-
DN5: D29.2 U82.4 USB2.D-
DN6: D34.2 U98.4 USB3.D-
DN7: D39.2 U114.4 USB4.D-
DP: D1.3 J1.A6 J1.B6 U2.3
DP1: D9.3 J4.A6 J4.B6 U18.3
DP2: D14.3 J6.A6 J6.B6 U34.3
DP3: D19.3 J8.A6 J8.B6 U50.3
DP4: D24.3 U66.3 USB1.D+
DP5: D29.3 U82.3 USB2.D+
DP6: D34.3 U98.3 USB3.D+
DP7: D39.3 U114.3 USB4.D+
EVNT: R6.7 U13.2
EVNT1: R15.7 U20.2
EVNT2: R24.7 U36.2
EVNT3: R33.7 U52.2
EVNT4: R42.7 U68.2
EVNT5: R49.7 U84.2
EVNT6: R56.7 U100.2
EVNT7: R63.7 U116.2
EVNT-PB: U2.18 U13.4
EVNT-PB1: U18.18 U20.4
EVNT-PB2: U34.18 U36.4
EVNT-PB3: U50.18 U52.4
EVNT-PB4: U66.18 U68.4
EVNT-PB5: U82.18 U84.4
EVNT-PB6: U98.18 U100.4
EVNT-PB7: U114.18 U116.4
GND: C1.P$2 C2.P$2 C3.P$2 C4.P$2 C5.P$2 C6.P$2 C7.P$2 C8.P$2 D1.1 D2.C D5.P$2 J1.A1_B12 J1.B1_A12 J1.SHIELD0 J1.SHIELD1 J1.SHIELD2 J1.SHIELD3 J2.6 R8.P$1 R9.P$1 U1.1 U2.2 U2.PAD U3.3 U4.3 U5.3 U6.3 U7.3 U8.3 U9.3 U10.3 U11.7 U11.10 U12.3 U13.3 U14.3 U15.3 U16.3
GND1: C9.P$2 C10.P$2 C11.P$2 C12.P$2 C13.P$2 C14.P$2 C15.P$2 C16.P$2 D8.C D9.1 D10.P$2 J3.6 J4.A1_B12 J4.B1_A12 J4.SHIELD0 J4.SHIELD1 J4.SHIELD2 J4.SHIELD3 R17.P$1 R18.P$1 U17.1 U18.2 U18.PAD U19.3 U20.3 U21.3 U22.3 U23.3 U24.3 U25.7 U25.10 U26.3 U27.3 U28.3 U29.3 U30.3 U31.3 U32.3
GND2: C17.P$2 C18.P$2 C19.P$2 C20.P$2 C21.P$2 C22.P$2 C23.P$2 C24.P$2 D13.C D14.1 D15.P$2 J5.6 J6.A1_B12 J6.B1_A12 J6.SHIELD0 J6.SHIELD1 J6.SHIELD2 J6.SHIELD3 R26.P$1 R27.P$1 U33.1 U34.2 U34.PAD U35.3 U36.3 U37.3 U38.3 U39.3 U40.3 U41.7 U41.10 U42.3 U43.3 U44.3 U45.3 U46.3 U47.3 U48.3
GND3: C25.P$2 C26.P$2 C27.P$2 C28.P$2 C29.P$2 C30.P$2 C31.P$2 C32.P$2 D18.C D19.1 D20.P$2 J7.6 J8.A1_B12 J8.B1_A12 J8.SHIELD0 J8.SHIELD1 J8.SHIELD2 J8.SHIELD3 R35.P$1 R36.P$1 U49.1 U50.2 U50.PAD U51.3 U52.3 U53.3 U54.3 U55.3 U56.3 U57.7 U57.10 U58.3 U59.3 U60.3 U61.3 U62.3 U63.3 U64.3
GND4: C33.P$2 C34.P$2 C35.P$2 C36.P$2 C37.P$2 C38.P$2 C39.P$2 C40.P$2 D23.C D24.1 D25.P$2 J9.6 U65.1 U66.2 U66.PAD U67.3 U68.3 U69.3 U70.3 U71.3 U72.3 U73.7 U73.10 U74.3 U75.3 U76.3 U77.3 U78.3 U79.3 U80.3 USB1.GND USB1.SHIELD1 USB1.SHIELD2 USB1.SHIELD3 USB1.SHIELD4 USB1.SHIELD5 USB1.SHIELD6
GND5: C41.P$2 C42.P$2 C43.P$2 C44.P$2 C45.P$2 C46.P$2 C47.P$2 C48.P$2 D28.C D29.1 D30.P$2 J10.6 U81.1 U82.2 U82.PAD U83.3 U84.3 U85.3 U86.3 U87.3 U88.3 U89.7 U89.10 U90.3 U91.3 U92.3 U93.3 U94.3 U95.3 U96.3 USB2.GND USB2.SHIELD1 USB2.SHIELD2 USB2.SHIELD3 USB2.SHIELD4 USB2.SHIELD5 USB2.SHIELD6
GND6: C49.P$2 C50.P$2 C51.P$2 C52.P$2 C53.P$2 C54.P$2 C55.P$2 C56.P$2 D33.C D34.1 D35.P$2 J11.6 U97.1 U98.2 U98.PAD U99.3 U100.3 U101.3 U102.3 U103.3 U104.3 U105.7 U105.10 U106.3 U107.3 U108.3 U109.3 U110.3 U111.3 U112.3 USB3.GND USB3.SHIELD1 USB3.SHIELD2 USB3.SHIELD3 USB3.SHIELD4 USB3.SHIELD5 USB3.SHIELD6
GND7: C57.P$2 C58.P$2 C59.P$2 C60.P$2 C61.P$2 C62.P$2 C63.P$2 C64.P$2 D38.C D39.1 D40.P$2 J12.6 U113.1 U114.2 U114.PAD U115.3 U116.3 U117.3 U118.3 U119.3 U120.3 U121.7 U121.10 U122.3 U123.3 U124.3 U125.3 U126.3 U127.3 U128.3 USB4.GND USB4.SHIELD1 USB4.SHIELD2 USB4.SHIELD3 USB4.SHIELD4 USB4.SHIELD5 USB4.SHIELD6
IO1: R14.4 U25.11
IO2: R15.8 U21.2
IO3: R23.4 U41.11
IO4: R24.8 U37.2
IO5: R32.4 U57.11
IO6: R6.8 U14.2
IO6-PB: U2.15 U14.4
IO6-PB1: U18.15 U21.4
IO6-PB2: U34.15 U37.4
IO6-PB3: U50.15 U53.4
IO6-PB4: U66.15 U69.4
IO6-PB5: U82.15 U85.4
IO6-PB6: U98.15 U101.4
IO6-PB7: U114.15 U117.4
IO7: R7.4 U11.11
IO7-PB: U2.14 U16.2
IO7-PB1: U18.14 U22.2
IO7-PB2: U34.14 U38.2
IO7-PB3: U50.14 U54.2
IO7-PB4: U66.14 U70.2
IO7-PB5: U82.14 U86.2
IO7-PB6: U98.14 U102.2
IO7-PB7: U114.14 U118.2
IO8: R33.8 U53.2
IO9: R41.4 U73.11
IO10: R42.8 U69.2
IO11: R48.4 U89.11
IO12: R49.8 U85.2
IO13: R55.4 U105.11
IO14: R56.8 U101.2
IO15: R62.4 U121.11
IO16: R63.8 U117.2
MISO: R7.2 U3.2
MISO1: R14.2 U26.2
MISO2: R23.2 U42.2
MISO3: R32.2 U58.2
MISO4: R41.2 U74.2
MISO5: R48.2 U90.2
MISO6: R55.2 U106.2
MISO7: R62.2 U122.2
MISO-PB: U2.24 U3.4
MISO-PB1: U18.24 U26.4
MISO-PB2: U34.24 U42.4
MISO-PB3: U50.24 U58.4
MISO-PB4: U66.24 U74.4
MISO-PB5: U82.24 U90.4
MISO-PB6: U98.24 U106.4
MISO-PB7: U114.24 U122.4
MOSI: R7.3 U11.12
MOSI1: R14.3 U25.12
MOSI2: R23.3 U41.12
MOSI3: R32.3 U57.12
MOSI4: R41.3 U73.12
MOSI5: R48.3 U89.12
MOSI6: R55.3 U105.12
MOSI7: R62.3 U121.12
MOSI-PB: U2.23 U4.2
MOSI-PB1: U18.23 U27.2
MOSI-PB2: U34.23 U43.2
MOSI-PB3: U50.23 U59.2
MOSI-PB4: U66.23 U75.2
MOSI-PB5: U82.23 U91.2
MOSI-PB6: U98.23 U107.2
MOSI-PB7: U114.23 U123.2
N$1: U11.6 U15.4
N$2: D3.A R3.P$1
N$3: D4.A R4.P$1
N$4: R2.P$2 U2.9
N$5: U5.4 U11.5
N$6: J2.13 R7.7
N$7: U4.4 U11.8
N$8: C5.P$1 U2.16
N$9: D2.A R1.P$1
N$10: U6.4 U11.4
N$11: U7.4 U11.3
N$12: U8.4 U11.2
N$13: F1.P$2 J1.A4_B9 J1.B4_A9
N$14: U11.9 U16.4
N$15: J1.B5 R8.P$2
N$16: J2.15 R7.6
N$17: J2.5 R5.8
N$18: J2.7 R5.7
N$19: J2.9 R5.6
N$20: J2.11 R5.5
N$21: J2.8 R6.4
N$22: J2.10 R6.3
N$23: J2.12 R6.2
N$24: J2.14 R6.1
N$25: J2.16 R7.5
N$26: J1.A5 R9.P$2
N$27: R10.P$2 U18.9
N$28: C13.P$1 U18.16
N$29: D6.A R11.P$1
N$30: D7.A R12.P$1
N$31: D8.A R16.P$1
N$32: J3.8 R15.4
N$33: J3.10 R15.3
N$34: J3.12 R15.2
N$35: J3.14 R15.1
N$36: J3.16 R14.5
N$37: J3.13 R14.7
N$38: J3.15 R14.6
N$39: J3.5 R13.8
N$40: J3.7 R13.7
N$41: J3.9 R13.6
N$42: J3.11 R13.5
N$43: U22.4 U25.9
N$44: U25.8 U27.4
N$45: U25.6 U32.4
N$46: U25.5 U28.4
N$47: U25.4 U29.4
N$48: U25.3 U30.4
N$49: U25.2 U31.4
N$50: F2.P$2 J4.A4_B9 J4.B4_A9
N$51: J4.B5 R17.P$2
N$52: J4.A5 R18.P$2
N$53: R19.P$2 U34.9
N$54: C21.P$1 U34.16
N$55: D11.A R20.P$1
N$56: D12.A R21.P$1
N$57: D13.A R25.P$1
N$58: J5.8 R24.4
N$59: J5.10 R24.3
N$60: J5.12 R24.2
N$61: J5.14 R24.1
N$62: J5.16 R23.5
N$63: J5.13 R23.7
N$64: J5.15 R23.6
N$65: J5.5 R22.8
N$66: J5.7 R22.7
N$67: J5.9 R22.6
N$68: J5.11 R22.5
N$69: U38.4 U41.9
N$70: U41.8 U43.4
N$71: U41.6 U48.4
N$72: U41.5 U44.4
N$73: U41.4 U45.4
N$74: U41.3 U46.4
N$75: U41.2 U47.4
N$76: F3.P$2 J6.A4_B9 J6.B4_A9
N$77: J6.B5 R26.P$2
N$78: J6.A5 R27.P$2
N$79: R28.P$2 U50.9
N$80: C29.P$1 U50.16
N$81: D16.A R29.P$1
N$82: D17.A R30.P$1
N$83: D18.A R34.P$1
N$84: J7.8 R33.4
N$85: J7.10 R33.3
N$86: J7.12 R33.2
N$87: J7.14 R33.1
N$88: J7.16 R32.5
N$89: J7.13 R32.7
N$90: J7.15 R32.6
N$91: J7.5 R31.8
N$92: J7.7 R31.7
N$93: J7.9 R31.6
N$94: J7.11 R31.5
N$95: U54.4 U57.9
N$96: U57.8 U59.4
N$97: U57.6 U64.4
N$98: U57.5 U60.4
N$99: U57.4 U61.4
N$100: U57.3 U62.4
N$101: U57.2 U63.4
N$102: F4.P$2 J8.A4_B9 J8.B4_A9
N$103: J8.B5 R35.P$2
N$104: J8.A5 R36.P$2
N$105: R37.P$2 U66.9
N$106: C37.P$1 U66.16
N$107: D21.A R38.P$1
N$108: D22.A R39.P$1
N$109: D23.A R43.P$1
N$110: J9.8 R42.4
N$111: J9.10 R42.3
N$112: J9.12 R42.2
N$113: J9.14 R42.1
N$114: J9.16 R41.5
N$115: J9.13 R41.7
N$116: J9.15 R41.6
N$117: J9.5 R40.8
N$118: J9.7 R40.7
N$119: J9.9 R40.6
N$120: J9.11 R40.5
N$121: U70.4 U73.9
N$122: U73.8 U75.4
N$123: U73.6 U80.4
N$124: U73.5 U76.4
N$125: U73.4 U77.4
N$126: U73.3 U78.4
N$127: U73.2 U79.4
N$128: F5.P$2 USB1.VBUS
N$129: R44.P$2 U82.9
N$130: C45.P$1 U82.16
N$131: D26.A R45.P$1
N$132: D27.A R46.P$1
N$133: D28.A R50.P$1
N$134: J10.8 R49.4
N$135: J10.10 R49.3
N$136: J10.12 R49.2
N$137: J10.14 R49.1
N$138: J10.16 R48.5
N$139: J10.13 R48.7
N$140: J10.15 R48.6
N$141: J10.5 R47.8
N$142: J10.7 R47.7
N$143: J10.9 R47.6
N$144: J10.11 R47.5
N$145: U86.4 U89.9
N$146: U89.8 U91.4
N$147: U89.6 U96.4
N$148: U89.5 U92.4
N$149: U89.4 U93.4
N$150: U89.3 U94.4
N$151: U89.2 U95.4
N$152: F6.P$2 USB2.VBUS
N$153: R51.P$2 U98.9
N$154: C53.P$1 U98.16
N$155: D31.A R52.P$1
N$156: D32.A R53.P$1
N$157: D33.A R57.P$1
N$158: J11.8 R56.4
N$159: J11.10 R56.3
N$160: J11.12 R56.2
N$161: J11.14 R56.1
N$162: J11.16 R55.5
N$163: J11.13 R55.7
N$164: J11.15 R55.6
N$165: J11.5 R54.8
N$166: J11.7 R54.7
N$167: J11.9 R54.6
N$168: J11.11 R54.5
N$169: U102.4 U105.9
N$170: U105.8 U107.4
N$171: U105.6 U112.4
N$172: U105.5 U108.4
N$173: U105.4 U109.4
N$174: U105.3 U110.4
N$175: U105.2 U111.4
N$176: F7.P$2 USB3.VBUS
N$177: R58.P$2 U114.9
N$178: C61.P$1 U114.16
N$179: D36.A R59.P$1
N$180: D37.A R60.P$1
N$181: D38.A R64.P$1
N$182: J12.8 R63.4
N$183: J12.10 R63.3
N$184: J12.12 R63.2
N$185: J12.14 R63.1
N$186: J12.16 R62.5
N$187: J12.13 R62.7
N$188: J12.15 R62.6
N$189: J12.5 R61.8
N$190: J12.7 R61.7
N$191: J12.9 R61.6
N$192: J12.11 R61.5
N$193: U118.4 U121.9
N$194: U121.8 U123.4
N$195: U121.6 U128.4
N$196: U121.5 U124.4
N$197: U121.4 U125.4
N$198: U121.3 U126.4
N$199: U121.2 U127.4
N$200: F8.P$2 USB4.VBUS
OE1: U9.4 U11.1
OE2: U10.4 U11.19
OE3: U24.4 U25.19
OE4: U23.4 U25.1
OE5: U40.4 U41.19
OE6: U39.4 U41.1
OE7: U56.4 U57.19
OE8: U55.4 U57.1
OE9: U72.4 U73.19
OE10: U71.4 U73.1
OE11: U88.4 U89.19
OE12: U87.4 U89.1
OE13: U104.4 U105.19
OE14: U103.4 U105.1
OE15: U120.4 U121.19
OE16: U119.4 U121.1
OEN-PB: U2.11 U10.2
OEN-PB1: U18.11 U24.2
OEN-PB2: U34.11 U40.2
OEN-PB3: U50.11 U56.2
OEN-PB4: U66.11 U72.2
OEN-PB5: U82.11 U88.2
OEN-PB6: U98.11 U104.2
OEN-PB7: U114.11 U120.2
RTR: R6.6 U12.2
RTR1: R15.6 U19.2
RTR2: R24.6 U35.2
RTR3: R33.6 U51.2
RTR4: R42.6 U67.2
RTR5: R49.6 U83.2
RTR6: R56.6 U99.2
RTR7: R63.6 U115.2
RTR-PB: U2.19 U12.4
RTR-PB1: U18.19 U19.4
RTR-PB2: U34.19 U35.4
RTR-PB3: U50.19 U51.4
RTR-PB4: U66.19 U67.4
RTR-PB5: U82.19 U83.4
RTR-PB6: U98.19 U99.4
RTR-PB7: U114.19 U115.4
SCK: R5.4 U11.15
SCK1: R13.4 U25.15
SCK2: R22.4 U41.15
SCK3: R31.4 U57.15
SCK4: R40.4 U73.15
SCK5: R47.4 U89.15
SCK6: R54.4 U105.15
SCK7: R61.4 U121.15
SCK-PB: U2.1 U5.2
SCK-PB1: U18.1 U28.2
SCK-PB2: U34.1 U44.2
SCK-PB3: U50.1 U60.2
SCK-PB4: U66.1 U76.2
SCK-PB5: U82.1 U92.2
SCK-PB6: U98.1 U108.2
SCK-PB7: U114.1 U124.2
SPIACT: D4.C U2.13
SPIACT1: D7.C U18.13
SPIACT2: D12.C U34.13
SPIACT3: D17.C U50.13
SPIACT4: D22.C U66.13
SPIACT5: D27.C U82.13
SPIACT6: D32.C U98.13
SPIACT7: D37.C U114.13
SUS: D3.C U2.12 U9.2
SUS1: D6.C U18.12 U23.2
SUS2: D11.C U34.12 U39.2
SUS3: D16.C U50.12 U55.2
SUS4: D21.C U66.12 U71.2
SUS5: D26.C U82.12 U87.2
SUS6: D31.C U98.12 U103.2
SUS7: D36.C U114.12 U119.2
VREF: C7.P$1 C8.P$1 D5.P$1 J2.1 J2.3 U4.5 U5.5 U6.5 U7.5 U8.5 U9.5 U10.5 U11.20 U15.5 U16.5
VREF1: C15.P$1 C16.P$1 D10.P$1 J3.1 J3.3 U22.5 U23.5 U24.5 U25.20 U27.5 U28.5 U29.5 U30.5 U31.5 U32.5
VREF2: C23.P$1 C24.P$1 D15.P$1 J5.1 J5.3 U38.5 U39.5 U40.5 U41.20 U43.5 U44.5 U45.5 U46.5 U47.5 U48.5
VREF3: C31.P$1 C32.P$1 D20.P$1 J7.1 J7.3 U54.5 U55.5 U56.5 U57.20 U59.5 U60.5 U61.5 U62.5 U63.5 U64.5
VREF4: C39.P$1 C40.P$1 D25.P$1 J9.1 J9.3 U70.5 U71.5 U72.5 U73.20 U75.5 U76.5 U77.5 U78.5 U79.5 U80.5
VREF5: C47.P$1 C48.P$1 D30.P$1 J10.1 J10.3 U86.5 U87.5 U88.5 U89.20 U91.5 U92.5 U93.5 U94.5 U95.5 U96.5
VREF6: C55.P$1 C56.P$1 D35.P$1 J11.1 J11.3 U102.5 U103.5 U104.5 U105.20 U107.5 U108.5 U109.5 U110.5 U111.5 U112.5
VREF7: C63.P$1 C64.P$1 D40.P$1 J12.1 J12.3 U118.5 U119.5 U120.5 U121.20 U123.5 U124.5 U125.5 U126.5 U127.5 U128.5

## Tracks (layer width: path | path; a pad name or v marks a point on that pad's centre or on a via)
3.3V  (via drill 0.3 pad 0.6)
  Top 0.2: R1.P$2 6.86,3.94 | 17.27,20.64 C2.P$1 | U3.5 10.62,15.48 v10.35,15.75 | U12.5 15.49,15.81 v14.99,15.81
  Top 0.3: 6.86,3.94 7.62,3.17 10.67,3.17 | 10.67,3.17 13.65,3.17 R4.P$2 | R3.P$2 10.67,3.17 | R2.P$1 13.21,7.81 13.75,8.35 U2.7 U2.6 U2.5 | U13.5 22.43,18.4 22.86,18.83 v22.86,20.89 | U14.5 26.21,18.4 26.67,18.86 v26.67,20.95 | C2.P$1 C6.P$1 19.05,20.45 v20.13,20.45
  Top 0.45: R3.P$2 13.21,6.54 R2.P$1 12.51,8.19 C3.P$1 C4.P$1 9.84,9.14 v9.78,9.21 | U1.2 17.27,20.64
  Bottom 0.2: v14.99,15.81 14.41,15.24 10.86,15.24 v10.35,15.75
  Bottom 0.3: v22.86,20.89 22.86,21.59 | v26.67,20.95 26.67,21.59
  Bottom 0.45: v9.78,9.21 9.78,15.18 v10.35,15.75 13.02,18.41 18.1,18.41 v20.13,20.45 21.27,21.59 22.86,21.59 26.67,21.59 40.64,21.59 43.5,18.73 46.35,18.73 J2.4
3.3V1  (via drill 0.3 pad 0.6)
  Top 0.2: R16.P$2 6.86,28.44 | 17.27,45.13 C12.P$1 | U26.5 10.62,39.98 v10.35,40.25 | U19.5 15.49,40.31 v14.99,40.31
  Top 0.3: 6.86,28.44 7.62,27.68 10.67,27.68 | 10.67,27.68 13.65,27.68 R12.P$2 | R11.P$2 10.67,27.68 | R10.P$1 13.21,32.31 13.75,32.85 U18.7 U18.6 U18.5 | U20.5 22.43,42.9 22.86,43.33 v22.86,45.39 | U21.5 26.21,42.9 26.67,43.36 v26.67,45.45 | C12.P$1 C14.P$1 19.05,44.95 v20.13,44.95
  Top 0.45: R11.P$2 13.21,31.04 R10.P$1 12.51,32.69 C10.P$1 C9.P$1 9.84,33.64 v9.78,33.71 | U17.2 17.27,45.13
  Bottom 0.2: v14.99,40.31 14.41,39.74 10.86,39.74 v10.35,40.25
  Bottom 0.3: v22.86,45.39 22.86,46.09 | v26.67,45.45 26.67,46.09
  Bottom 0.45: v9.78,33.71 9.78,39.68 v10.35,40.25 13.02,42.91 18.1,42.91 v20.13,44.95 21.27,46.09 22.86,46.09 26.67,46.09 40.64,46.09 43.5,43.23 46.35,43.23 J3.4
3.3V2  (via drill 0.3 pad 0.6)
  Top 0.2: R25.P$2 6.86,52.94 | 17.27,69.64 C20.P$1 | U42.5 10.62,64.48 v10.35,64.75 | U35.5 15.49,64.81 v14.99,64.81
  Top 0.3: 6.86,52.94 7.62,52.17 10.67,52.17 | 10.67,52.17 13.65,52.17 R21.P$2 | R20.P$2 10.67,52.17 | R19.P$1 13.21,56.81 13.75,57.35 U34.7 U34.6 U34.5 | U36.5 22.43,67.4 22.86,67.83 v22.86,69.89 | U37.5 26.21,67.4 26.67,67.86 v26.67,69.95 | C20.P$1 C22.P$1 19.05,69.45 v20.13,69.45
  Top 0.45: R20.P$2 13.21,55.54 R19.P$1 12.51,57.19 C18.P$1 C17.P$1 9.84,58.14 v9.78,58.21 | U33.2 17.27,69.64
  Bottom 0.2: v14.99,64.81 14.41,64.24 10.86,64.24 v10.35,64.75
  Bottom 0.3: v22.86,69.89 22.86,70.59 | v26.67,69.95 26.67,70.59
  Bottom 0.45: v9.78,58.21 9.78,64.18 v10.35,64.75 13.02,67.42 18.1,67.42 v20.13,69.45 21.27,70.59 22.86,70.59 26.67,70.59 40.64,70.59 43.5,67.73 46.35,67.73 J5.4
3.3V3  (via drill 0.3 pad 0.6)
  Top 0.2: R34.P$2 6.86,77.44 | 17.27,94.14 C28.P$1 | U58.5 10.62,88.98 v10.35,89.25 | U51.5 15.49,89.31 v14.99,89.31
  Top 0.3: 6.86,77.44 7.62,76.67 10.67,76.67 | 10.67,76.67 13.65,76.67 R30.P$2 | R29.P$2 10.67,76.67 | R28.P$1 13.21,81.31 13.75,81.85 U50.7 U50.6 U50.5 | U52.5 22.43,91.9 22.86,92.33 v22.86,94.39 | U53.5 26.21,91.9 26.67,92.36 v26.67,94.45 | C28.P$1 C30.P$1 19.05,93.95 v20.13,93.95
  Top 0.45: R29.P$2 13.21,80.04 R28.P$1 12.51,81.69 C26.P$1 C25.P$1 9.84,82.64 v9.78,82.71 | U49.2 17.27,94.14
  Bottom 0.2: v14.99,89.31 14.41,88.74 10.86,88.74 v10.35,89.25
  Bottom 0.3: v22.86,94.39 22.86,95.09 | v26.67,94.45 26.67,95.09
  Bottom 0.45: v9.78,82.71 9.78,88.68 v10.35,89.25 13.02,91.92 18.1,91.92 v20.13,93.95 21.27,95.09 22.86,95.09 26.67,95.09 40.64,95.09 43.5,92.23 46.35,92.23 J7.4
3.3V4  (via drill 0.3 pad 0.6)
  Top 0.2: R43.P$2 57.86,3.94 | 68.27,20.64 C36.P$1 | U74.5 61.62,15.48 v61.35,15.75 | U67.5 66.5,15.81 v65.99,15.81
  Top 0.3: 57.86,3.94 58.62,3.17 61.67,3.17 | 61.67,3.17 64.66,3.17 R39.P$2 | R38.P$2 61.67,3.17 | R37.P$1 64.21,7.81 64.75,8.35 U66.7 U66.6 U66.5 | U68.5 73.43,18.4 73.86,18.83 v73.86,20.89 | U69.5 77.21,18.4 77.67,18.86 v77.67,20.95 | C36.P$1 C38.P$1 70.05,20.45 v71.13,20.45
  Top 0.45: R38.P$2 64.21,6.54 R37.P$1 63.51,8.19 C34.P$1 C33.P$1 60.84,9.14 v60.78,9.21 | U65.2 68.27,20.64
  Bottom 0.2: v65.99,15.81 65.42,15.24 61.86,15.24 v61.35,15.75
  Bottom 0.3: v73.86,20.89 73.86,21.59 | v77.67,20.95 77.67,21.59
  Bottom 0.45: v60.78,9.21 60.78,15.18 v61.35,15.75 64.02,18.41 69.1,18.41 v71.13,20.45 72.27,21.59 73.86,21.59 77.67,21.59 91.64,21.59 94.5,18.73 97.35,18.73 J9.4
3.3V5  (via drill 0.3 pad 0.6)
  Top 0.2: R50.P$2 57.86,28.44 | 68.27,45.13 C44.P$1 | U90.5 61.62,39.98 v61.35,40.25 | U83.5 66.5,40.31 v65.99,40.31
  Top 0.3: 57.86,28.44 58.62,27.68 61.67,27.68 | 61.67,27.68 64.66,27.68 R46.P$2 | R45.P$2 61.67,27.68 | R44.P$1 64.21,32.31 64.75,32.85 U82.7 U82.6 U82.5 | U84.5 73.43,42.9 73.86,43.33 v73.86,45.39 | U85.5 77.21,42.9 77.67,43.36 v77.67,45.45 | C44.P$1 C46.P$1 70.05,44.95 v71.13,44.95
  Top 0.45: R45.P$2 64.21,31.04 R44.P$1 63.51,32.69 C42.P$1 C41.P$1 60.84,33.64 v60.78,33.71 | U81.2 68.27,45.13
  Bottom 0.2: v65.99,40.31 65.42,39.74 61.86,39.74 v61.35,40.25
  Bottom 0.3: v73.86,45.39 73.86,46.09 | v77.67,45.45 77.67,46.09
  Bottom 0.45: v60.78,33.71 60.78,39.68 v61.35,40.25 64.02,42.91 69.1,42.91 v71.13,44.95 72.27,46.09 73.86,46.09 77.67,46.09 91.64,46.09 94.5,43.23 97.35,43.23 J10.4
3.3V6  (via drill 0.3 pad 0.6)
  Top 0.2: R57.P$2 57.86,52.94 | 68.27,69.64 C52.P$1 | U106.5 61.62,64.48 v61.35,64.75 | U99.5 66.5,64.81 v65.99,64.81
  Top 0.3: 57.86,52.94 58.62,52.17 61.67,52.17 | 61.67,52.17 64.66,52.17 R53.P$2 | R52.P$2 61.67,52.17 | R51.P$1 64.21,56.81 64.75,57.35 U98.7 U98.6 U98.5 | U100.5 73.43,67.4 73.86,67.83 v73.86,69.89 | U101.5 77.21,67.4 77.67,67.86 v77.67,69.95 | C52.P$1 C54.P$1 70.05,69.45 v71.13,69.45
  Top 0.45: R52.P$2 64.21,55.54 R51.P$1 63.51,57.19 C50.P$1 C49.P$1 60.84,58.14 v60.78,58.21 | U97.2 68.27,69.64
  Bottom 0.2: v65.99,64.81 65.42,64.24 61.86,64.24 v61.35,64.75
  Bottom 0.3: v73.86,69.89 73.86,70.59 | v77.67,69.95 77.67,70.59
  Bottom 0.45: v60.78,58.21 60.78,64.18 v61.35,64.75 64.02,67.42 69.1,67.42 v71.13,69.45 72.27,70.59 73.86,70.59 77.67,70.59 91.64,70.59 94.5,67.73 97.35,67.73 J11.4
3.3V7  (via drill 0.3 pad 0.6)
  Top 0.2: R64.P$2 57.86,77.44 | 68.27,94.14 C60.P$1 | U122.5 61.62,88.98 v61.35,89.25 | U115.5 66.5,89.31 v65.99,89.31
  Top 0.3: 57.86,77.44 58.62,76.67 61.67,76.67 | 61.67,76.67 64.66,76.67 R60.P$2 | R59.P$2 61.67,76.67 | R58.P$1 64.21,81.31 64.75,81.85 U114.7 U114.6 U114.5 | U116.5 73.43,91.9 73.86,92.33 v73.86,94.39 | U117.5 77.21,91.9 77.67,92.36 v77.67,94.45 | C60.P$1 C62.P$1 70.05,93.95 v71.13,93.95
  Top 0.45: R59.P$2 64.21,80.04 R58.P$1 63.51,81.69 C58.P$1 C57.P$1 60.84,82.64 v60.78,82.71 | U113.2 68.27,94.14
  Bottom 0.2: v65.99,89.31 65.42,88.74 61.86,88.74 v61.35,89.25
  Bottom 0.3: v73.86,94.39 73.86,95.09 | v77.67,94.45 77.67,95.09
  Bottom 0.45: v60.78,82.71 60.78,88.68 v61.35,89.25 64.02,91.92 69.1,91.92 v71.13,93.95 72.27,95.09 73.86,95.09 77.67,95.09 91.64,95.09 94.5,92.23 97.35,92.23 J12.4
5V  (via drill 0.3 pad 0.6)
  Top 0.2: U2.8 14.25,8.13 14.08,7.96 v14.08,6.33 | v12.06,13.46 11.09,13.46 9.72,12.1 D1.4 | 9.09,19.65 F1.P$1
  Top 0.45: U1.3 12.63,19.68 C1.P$1 | J2.2 45.97,21.65 10.29,21.65 9.12,20.48 F1.P$1 9.12,19.28 8.89,19.05 9.08,18.86 C1.P$1 | 11.75,18.86 C1.P$1 | D1.4 9.09,19.65
  Bottom 0.2: v14.08,6.33 11.3,9.11 11.3,12.7 v12.06,13.46
5V1  (via drill 0.3 pad 0.6)
  Top 0.2: U18.8 14.25,32.63 14.08,32.45 v14.08,30.83 | v12.06,37.96 11.09,37.96 9.72,36.6 D9.4 | 9.09,44.15 F2.P$1
  Top 0.45: U17.3 12.63,44.19 C11.P$1 | J3.2 45.97,46.15 10.29,46.15 9.12,44.98 F2.P$1 9.12,43.78 8.89,43.55 9.08,43.36 C11.P$1 | 11.75,43.36 C11.P$1 | D9.4 9.09,44.15
  Bottom 0.2: v14.08,30.83 11.3,33.61 11.3,37.2 v12.06,37.96
5V2  (via drill 0.3 pad 0.6)
  Top 0.2: U34.8 14.25,57.13 14.08,56.95 v14.08,55.33 | v12.06,62.46 11.09,62.46 9.72,61.1 D14.4 | 9.09,68.65 F3.P$1
  Top 0.45: U33.3 12.63,68.69 C19.P$1 | J5.2 45.97,70.65 10.29,70.65 9.12,69.48 F3.P$1 9.12,68.28 8.89,68.05 9.08,67.86 C19.P$1 | 11.75,67.86 C19.P$1 | D14.4 9.09,68.65
  Bottom 0.2: v14.08,55.33 11.3,58.11 11.3,61.7 v12.06,62.46
5V3  (via drill 0.3 pad 0.6)
  Top 0.2: U50.8 14.25,81.63 14.08,81.45 v14.08,79.83 | v12.06,86.96 11.09,86.96 9.72,85.6 D19.4 | 9.09,93.15 F4.P$1
  Top 0.45: U49.3 12.63,93.19 C27.P$1 | J7.2 45.97,95.15 10.29,95.15 9.12,93.98 F4.P$1 9.12,92.78 8.89,92.55 9.08,92.36 C27.P$1 | 11.75,92.36 C27.P$1 | D19.4 9.09,93.15
  Bottom 0.2: v14.08,79.83 11.3,82.61 11.3,86.2 v12.06,86.96
5V4  (via drill 0.3 pad 0.6)
  Top 0.2: U66.8 65.25,8.13 65.08,7.96 v65.08,6.33 | v63.06,13.46 62.09,13.46 60.72,12.1 D24.4 | 60.09,19.65 F5.P$1
  Top 0.45: U65.3 63.63,19.68 C35.P$1 | J9.2 96.97,21.65 61.29,21.65 60.12,20.48 F5.P$1 60.12,19.28 59.89,19.05 60.08,18.86 C35.P$1 | 62.75,18.86 C35.P$1 | D24.4 60.09,19.65
  Bottom 0.2: v65.08,6.33 62.3,9.11 62.3,12.7 v63.06,13.46
5V5  (via drill 0.3 pad 0.6)
  Top 0.2: U82.8 65.25,32.63 65.08,32.45 v65.08,30.83 | v63.06,37.96 62.09,37.96 60.72,36.6 D29.4 | 60.09,44.15 F6.P$1
  Top 0.45: U81.3 63.63,44.19 C43.P$1 | J10.2 96.97,46.15 61.29,46.15 60.12,44.98 F6.P$1 60.12,43.78 59.89,43.55 60.08,43.36 C43.P$1 | 62.75,43.36 C43.P$1 | D29.4 60.09,44.15
  Bottom 0.2: v65.08,30.83 62.3,33.61 62.3,37.2 v63.06,37.96
5V6  (via drill 0.3 pad 0.6)
  Top 0.2: U98.8 65.25,57.13 65.08,56.95 v65.08,55.33 | v63.06,62.46 62.09,62.46 60.72,61.1 D34.4 | 60.09,68.65 F7.P$1
  Top 0.45: U97.3 63.63,68.69 C51.P$1 | J11.2 96.97,70.65 61.29,70.65 60.12,69.48 F7.P$1 60.12,68.28 59.89,68.05 60.08,67.86 C51.P$1 | 62.75,67.86 C51.P$1 | D34.4 60.09,68.65
  Bottom 0.2: v65.08,55.33 62.3,58.11 62.3,61.7 v63.06,62.46
5V7  (via drill 0.3 pad 0.6)
  Top 0.2: U114.8 65.25,81.63 65.08,81.45 v65.08,79.83 | v63.06,86.96 62.09,86.96 60.72,85.6 D39.4 | 60.09,93.15 F8.P$1
  Top 0.45: U113.3 63.63,93.19 C59.P$1 | J12.2 96.97,95.15 61.29,95.15 60.12,93.98 F8.P$1 60.12,92.78 59.89,92.55 60.08,92.36 C59.P$1 | 62.75,92.36 C59.P$1 | D39.4 60.09,93.15
  Bottom 0.2: v65.08,79.83 62.3,82.61 62.3,86.2 v63.06,86.96
CLKO
  Top 0.2: U11.14 36.62,10.2 38.91,12.49 R6.5
CLKO1
  Top 0.2: U25.14 36.62,34.7 38.91,36.99 R15.5
CLKO2
  Top 0.2: U41.14 36.62,59.2 38.91,61.49 R24.5
CLKO3
  Top 0.2: U57.14 36.62,83.7 38.91,85.99 R33.5
CLKO4
  Top 0.2: U73.14 87.62,10.2 89.91,12.49 R42.5
CLKO5
  Top 0.2: U89.14 87.62,34.7 89.91,36.99 R49.5
CLKO6
  Top 0.2: U105.14 87.62,59.2 89.91,61.49 R56.5
CLKO7
  Top 0.2: U121.14 87.62,83.7 89.91,85.99 R63.5
CLKO-PB
  Top 0.2: U2.17 19.11,11.94 20.79,10.26 U15.2
CLKO-PB1
  Top 0.2: U18.17 19.11,36.44 20.79,34.76 U32.2
CLKO-PB2
  Top 0.2: U34.17 19.11,60.94 20.79,59.26 U48.2
CLKO-PB3
  Top 0.2: U50.17 19.11,85.44 20.79,83.76 U64.2
CLKO-PB4
  Top 0.2: U66.17 70.11,11.94 71.79,10.26 U80.2
CLKO-PB5
  Top 0.2: U82.17 70.11,36.44 71.79,34.76 U96.2
CLKO-PB6
  Top 0.2: U98.17 70.11,60.94 71.79,59.26 U112.2
CLKO-PB7
  Top 0.2: U114.17 70.11,85.44 71.79,83.76 U128.2
CS0
  Top 0.2: U11.16 36.63,11.5 37.79,12.66 37.79,14.93 38.65,15.79 R5.3
CS0-PB  (via drill 0.3 pad 0.6)
  Top 0.2: U6.2 21.92,12.69 21.53,12.69 v21.02,13.21 | v14.48,14.61 14.48,14.57 14.75,14.3 U2.22
  Bottom 0.2: v21.02,13.21 20.64,13.59 15.49,13.59 v14.48,14.61
CS0-PB1  (via drill 0.3 pad 0.6)
  Top 0.2: U29.2 21.92,37.19 21.53,37.19 v21.02,37.71 | v14.48,39.1 14.48,39.07 14.75,38.8 U18.22
  Bottom 0.2: v21.02,37.71 20.64,38.09 15.49,38.09 v14.48,39.1
CS0-PB2  (via drill 0.3 pad 0.6)
  Top 0.2: U45.2 21.92,61.69 21.53,61.69 v21.02,62.21 | v14.48,63.6 14.48,63.57 14.75,63.3 U34.22
  Bottom 0.2: v21.02,62.21 20.64,62.59 15.49,62.59 v14.48,63.6
CS0-PB3  (via drill 0.3 pad 0.6)
  Top 0.2: U61.2 21.92,86.19 21.53,86.19 v21.02,86.71 | v14.48,88.11 14.48,88.07 14.75,87.8 U50.22
  Bottom 0.2: v21.02,86.71 20.64,87.09 15.49,87.09 v14.48,88.11
CS0-PB4  (via drill 0.3 pad 0.6)
  Top 0.2: U77.2 72.92,12.69 72.53,12.69 v72.02,13.21 | v65.48,14.61 65.48,14.57 65.75,14.3 U66.22
  Bottom 0.2: v72.02,13.21 71.64,13.59 66.49,13.59 v65.48,14.61
CS0-PB5  (via drill 0.3 pad 0.6)
  Top 0.2: U93.2 72.92,37.19 72.53,37.19 v72.02,37.71 | v65.48,39.1 65.48,39.07 65.75,38.8 U82.22
  Bottom 0.2: v72.02,37.71 71.64,38.09 66.49,38.09 v65.48,39.1
CS0-PB6  (via drill 0.3 pad 0.6)
  Top 0.2: U109.2 72.92,61.69 72.53,61.69 v72.02,62.21 | v65.48,63.6 65.48,63.57 65.75,63.3 U98.22
  Bottom 0.2: v72.02,62.21 71.64,62.59 66.49,62.59 v65.48,63.6
CS0-PB7  (via drill 0.3 pad 0.6)
  Top 0.2: U125.2 72.92,86.19 72.53,86.19 v72.02,86.71 | v65.48,88.11 65.48,88.07 65.75,87.8 U114.22
  Bottom 0.2: v72.02,86.71 71.64,87.09 66.49,87.09 v65.48,88.11
CS1
  Top 0.2: U11.17 36.6,12.15 37.34,12.89 37.34,15.3 38.62,16.59 R5.2
CS1-PB  (via drill 0.3 pad 0.6)
  Top 0.2: U7.2 25.53,12.76 v24.89,13.4 | v15.43,14.61 15.25,14.43 U2.21
  Bottom 0.2: v24.89,13.4 24.32,13.97 16.07,13.97 v15.43,14.61
CS1-PB1  (via drill 0.3 pad 0.6)
  Top 0.2: U30.2 25.53,37.26 v24.89,37.9 | v15.43,39.1 15.25,38.92 U18.21
  Bottom 0.2: v24.89,37.9 24.32,38.47 16.07,38.47 v15.43,39.1
CS1-PB2  (via drill 0.3 pad 0.6)
  Top 0.2: U46.2 25.53,61.76 v24.89,62.4 | v15.43,63.6 15.25,63.42 U34.21
  Bottom 0.2: v24.89,62.4 24.32,62.97 16.07,62.97 v15.43,63.6
CS1-PB3  (via drill 0.3 pad 0.6)
  Top 0.2: U62.2 25.53,86.26 v24.89,86.9 | v15.43,88.11 15.25,87.92 U50.21
  Bottom 0.2: v24.89,86.9 24.32,87.47 16.07,87.47 v15.43,88.11
CS1-PB4  (via drill 0.3 pad 0.6)
  Top 0.2: U78.2 76.53,12.76 v75.89,13.4 | v66.43,14.61 66.25,14.43 U66.21
  Bottom 0.2: v75.89,13.4 75.32,13.97 67.07,13.97 v66.43,14.61
CS1-PB5  (via drill 0.3 pad 0.6)
  Top 0.2: U94.2 76.53,37.26 v75.89,37.9 | v66.43,39.1 66.25,38.92 U82.21
  Bottom 0.2: v75.89,37.9 75.32,38.47 67.07,38.47 v66.43,39.1
CS1-PB6  (via drill 0.3 pad 0.6)
  Top 0.2: U110.2 76.53,61.76 v75.89,62.4 | v66.43,63.6 66.25,63.42 U98.21
  Bottom 0.2: v75.89,62.4 75.32,62.97 67.07,62.97 v66.43,63.6
CS1-PB7  (via drill 0.3 pad 0.6)
  Top 0.2: U126.2 76.53,86.26 v75.89,86.9 | v66.43,88.11 66.25,87.92 U114.21
  Bottom 0.2: v75.89,86.9 75.32,87.47 67.07,87.47 v66.43,88.11
CS2
  Top 0.2: U11.18 36.55,12.8 36.89,13.14 36.89,15.75 38.64,17.49 R5.1
CS2-PB  (via drill 0.3 pad 0.6)
  Top 0.2: U8.2 21.61,15.26 21.18,15.68 v20.95,15.68 | v16.38,14.61 15.75,13.97 U2.20
  Bottom 0.2: v20.95,15.68 19.62,14.35 16.64,14.35 v16.38,14.61
CS2-PB1  (via drill 0.3 pad 0.6)
  Top 0.2: U31.2 21.61,39.76 21.18,40.18 v20.95,40.18 | v16.38,39.1 15.75,38.47 U18.20
  Bottom 0.2: v20.95,40.18 19.62,38.85 16.64,38.85 v16.38,39.1
CS2-PB2  (via drill 0.3 pad 0.6)
  Top 0.2: U47.2 21.61,64.26 21.18,64.68 v20.95,64.68 | v16.38,63.6 15.75,62.97 U34.20
  Bottom 0.2: v20.95,64.68 19.62,63.35 16.64,63.35 v16.38,63.6
CS2-PB3  (via drill 0.3 pad 0.6)
  Top 0.2: U63.2 21.61,88.76 21.18,89.18 v20.95,89.18 | v16.38,88.11 15.75,87.47 U50.20
  Bottom 0.2: v20.95,89.18 19.62,87.85 16.64,87.85 v16.38,88.11
CS2-PB4  (via drill 0.3 pad 0.6)
  Top 0.2: U79.2 72.61,15.26 72.18,15.68 v71.95,15.68 | v67.38,14.61 66.75,13.97 U66.20
  Bottom 0.2: v71.95,15.68 70.62,14.35 67.64,14.35 v67.38,14.61
CS2-PB5  (via drill 0.3 pad 0.6)
  Top 0.2: U95.2 72.61,39.76 72.18,40.18 v71.95,40.18 | v67.38,39.1 66.75,38.47 U82.20
  Bottom 0.2: v71.95,40.18 70.62,38.85 67.64,38.85 v67.38,39.1
CS2-PB6  (via drill 0.3 pad 0.6)
  Top 0.2: U111.2 72.61,64.26 72.18,64.68 v71.95,64.68 | v67.38,63.6 66.75,62.97 U98.20
  Bottom 0.2: v71.95,64.68 70.62,63.35 67.64,63.35 v67.38,63.6
CS2-PB7  (via drill 0.3 pad 0.6)
  Top 0.2: U127.2 72.61,88.76 72.18,89.18 v71.95,89.18 | v67.38,88.11 66.75,87.47 U114.20
  Bottom 0.2: v71.95,89.18 70.62,87.85 67.64,87.85 v67.38,88.11
CS3
  Top 0.2: U25.16 36.63,36 37.79,37.16 37.79,39.43 38.65,40.29 R13.3
CS4
  Top 0.2: U25.17 36.6,36.65 37.34,37.39 37.34,39.8 38.62,41.09 R13.2
CS5
  Top 0.2: U25.18 36.55,37.3 36.89,37.65 36.89,40.25 38.64,41.99 R13.1
CS6
  Top 0.2: U41.16 36.63,60.5 37.79,61.66 37.79,63.93 38.65,64.79 R22.3
CS7
  Top 0.2: U41.17 36.6,61.15 37.34,61.89 37.34,64.3 38.62,65.59 R22.2
CS8
  Top 0.2: U41.18 36.55,61.8 36.89,62.15 36.89,64.75 38.64,66.49 R22.1
CS9
  Top 0.2: U57.16 36.63,85 37.79,86.16 37.79,88.43 38.65,89.29 R31.3
CS10
  Top 0.2: U57.17 36.6,85.65 37.34,86.39 37.34,88.8 38.62,90.09 R31.2
CS11
  Top 0.2: U57.18 36.55,86.3 36.89,86.64 36.89,89.25 38.64,90.99 R31.1
CS12
  Top 0.2: U73.16 87.63,11.5 88.79,12.66 88.79,14.93 89.65,15.79 R40.3
CS13
  Top 0.2: U73.17 87.6,12.15 88.34,12.89 88.34,15.3 89.62,16.59 R40.2
CS14
  Top 0.2: U73.18 87.55,12.8 87.89,13.14 87.89,15.75 89.64,17.49 R40.1
CS15